# EAGLE board rcontrolv0.1 (EAGLE 6.5.0)
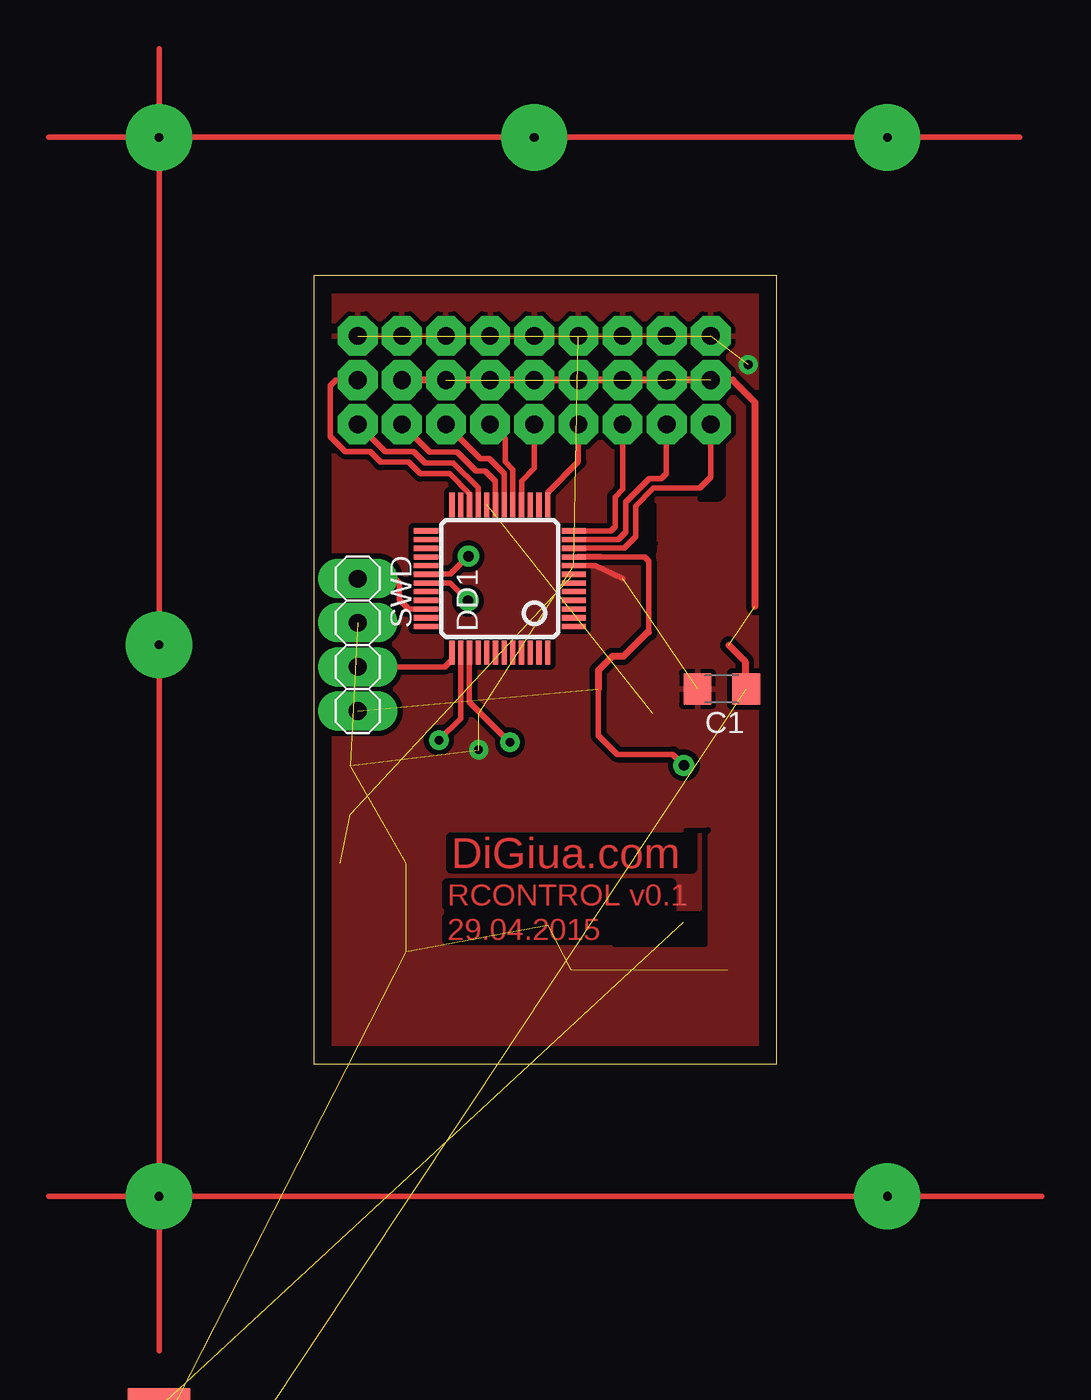
[diagram p0: board, top side]
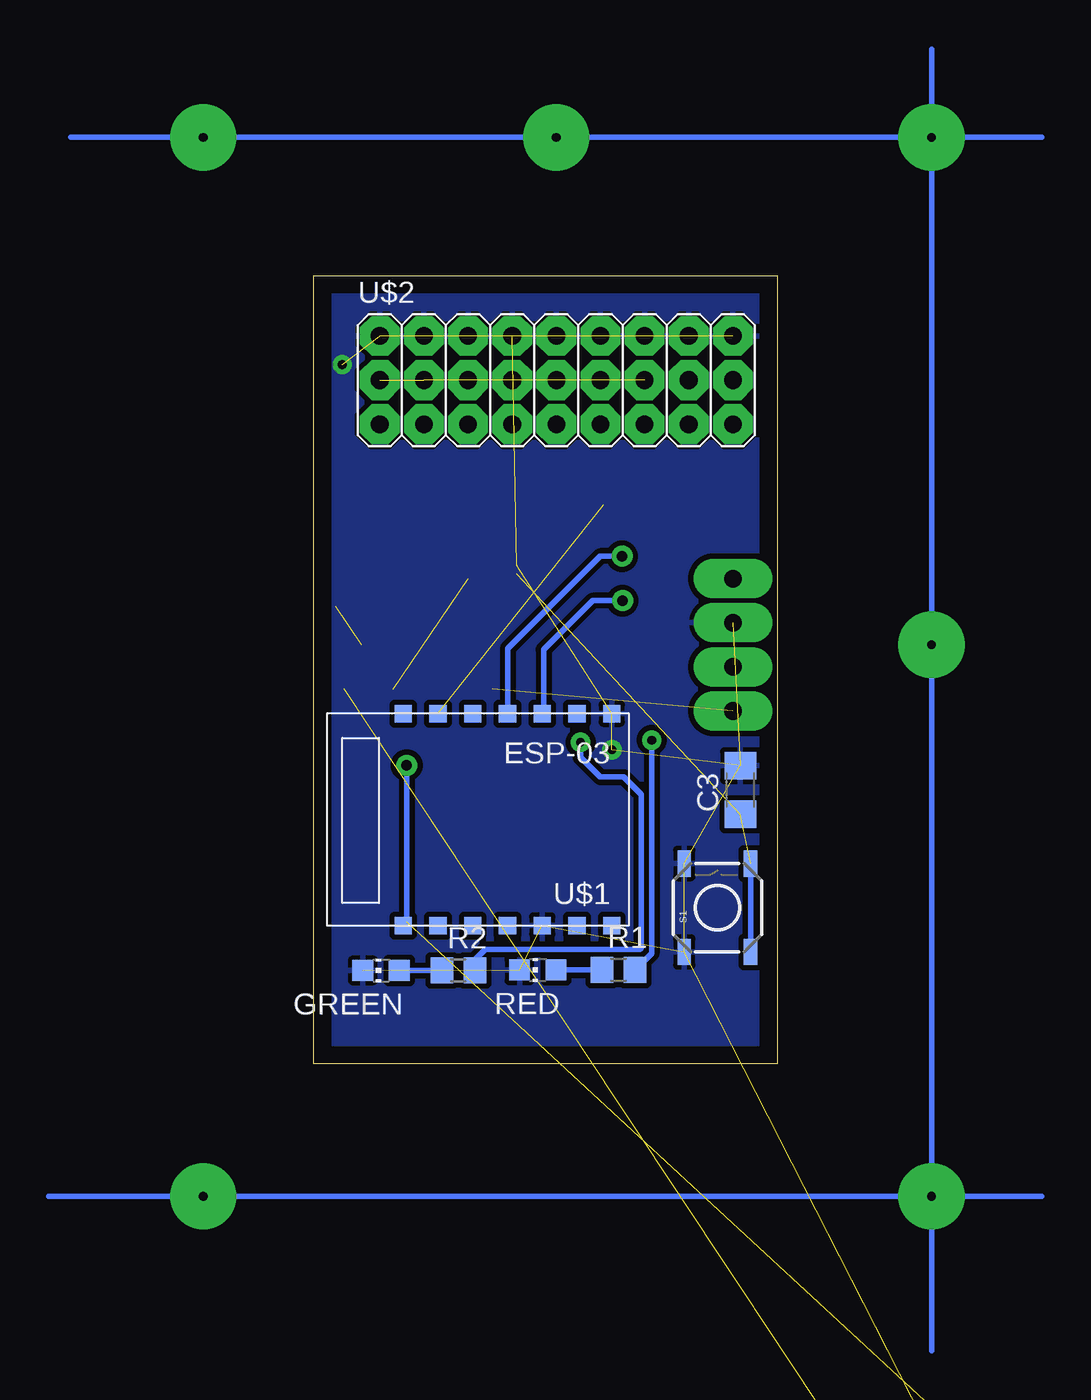
[diagram p1: board, bottom side, seen from below]

Size 26.65 x 45.39 mm. Coordinates in mm from the lower left corner, seen from the top.
Outline: 0,0 26.65,0 26.65,45.39 0,45.39 0,0
Copper layers (1*16): Top 0.035mm / dielectric 1.5mm / Bottom 0.035mm
Design rules "my": minimum track width 10mil, minimum drill 32mil, track to track 12mil, track to pad 12mil, pad to pad 12mil, via to via 12mil, smd to smd 8mil, copper to edge 40mil, drill to drill 8mil, minimum pad ring 25mil, minimum via ring 12mil, stop-mask expansion 4mil, vias tented up to drill 0mil, thermal gap 10mil
tRestrict: 24 lines

## Footprints (pad centres in the part's own frame; a part is rotated, then mirrored left to right if it is on the bottom)
C1206 = smd 1.6 x 1.8: 1 -1.4,0; 2 1.4,0
CT3528 = smd 2 x 2.2: + -1.5,0; - 1.5,0
LQFP48 = smd 0.3 x 1.4: 1 -2.75,-4.25; 2 -2.25,-4.25; 3 -1.75,-4.25; 4 -1.25,-4.25; 5 -0.75,-4.25; 6 -0.25,-4.25; 7 0.25,-4.25; 8 0.75,-4.25; 9 1.25,-4.25; 10 1.75,-4.25; 11 2.25,-4.25; 12 2.75,-4.25; 25 2.75,4.25; 26 2.25,4.25; 27 1.75,4.25; 28 1.25,4.25; 29 0.75,4.25; 30 0.25,4.25; 31 -0.25,4.25; 32 -0.75,4.25; 33 -1.25,4.25; 34 -1.75,4.25; 35 -2.25,4.25; 36 -2.75,4.25 | smd 1.4 x 0.3: 13 4.25,-2.75; 14 4.25,-2.25; 15 4.25,-1.75; 16 4.25,-1.25; 17 4.25,-0.75; 18 4.25,-0.25; 19 4.25,0.25; 20 4.25,0.75; 21 4.25,1.25; 22 4.25,1.75; 23 4.25,2.25; 24 4.25,2.75; 37 -4.25,2.75; 38 -4.25,2.25; 39 -4.25,1.75; 40 -4.25,1.25; 41 -4.25,0.75; 42 -4.25,0.25; 43 -4.25,-0.25; 44 -4.25,-0.75; 45 -4.25,-1.25; 46 -4.25,-1.75; 47 -4.25,-2.25; 48 -4.25,-2.75
CHIP-LED0805 = smd 1.2 x 1.2: A 0,-1.05; C 0,1.05
SOT223 = smd 1.219 x 2.235: 1 -2.311,-3.099; 2 0,-3.099; 3 2.311,-3.099 | smd 3.6 x 2.2: TAB 0,3.099
R0805 = smd 1.3 x 1.5: 1 -0.95,0; 2 0.95,0
TACTILE_SWITCH_SMD = smd 1.524 x 0.762: 1 -2.54,1.905; 2 2.54,1.905; 3 -2.54,-1.905; 4 2.54,-1.905
1X04 = drill 1.016 long: 1 -3.81,0; 2 -1.27,0; 3 1.27,0; 4 3.81,0
ESP-03 = smd 1 x 1: 1 6.2,-7; 2 6.2,-5; 3 6.2,-3; 4 6.2,-1; 5 6.2,1; 6 6.2,3; 7 6.2,5; 8 -6,5; 9 -6,3; 10 -6,1; 11 -6,-1; 12 -6,-3; 13 -6,-5; 14 -6,-7
3X09 = drill 1.016 octagon: 1 1.27,3.81; 2 1.27,6.35; 3 1.27,8.89; 4 3.81,3.81; 5 3.81,6.35; 6 3.81,8.89; 7 6.35,3.81; 8 6.35,6.35; 9 6.35,8.89; 10 8.89,3.81; 11 8.89,6.35; 12 8.89,8.89; 13 11.43,3.81; 14 11.43,6.35; 15 11.43,8.89; 16 13.97,3.81; 17 13.97,6.35; 18 13.97,8.89; 19 16.51,3.81; 020 16.51,6.35; 20 1.27,6.35; 21 1.27,6.35; 021 16.51,8.89; 022 19.05,3.81; 22 1.27,6.35; 023 19.05,6.35; 23 1.27,6.35; 24 19.05,8.89; 25 21.59,3.81; 26 21.59,6.35; 27 21.59,8.89

## Placement (x,y rotation side)
C1  0.1uF  [C1206]  23.5,21.59 180 top
C2  [CT3528]  -11.43,-31.75 0 top  (outside the outline)
C3  0.1uF  [C1206]  2.11,15.77 90 bottom
DD1  [LQFP48]  10.72,27.94 90 top
GREEN  [CHIP-LED0805]  22.78,5.38 90 bottom
IC1  LM1117IMPX-3.3  [SOT223]  -8.89,-22.86 0 top  (outside the outline)
R1  160  [R0805]  9.12,5.41 0 bottom
R2  160  [R0805]  18.34,5.38 0 bottom
RED  [CHIP-LED0805]  13.77,5.41 90 bottom
S1  [TACTILE_SWITCH_SMD]  3.43,8.99 90 bottom
SWD  [1X04]  2.54,24.13 270 top
U$1  ESP8266_ESP-03  [ESP-03]  16.51,13.97 90 bottom
U$2  [3X09]  24.13,33.02 0 bottom

## Library data of the parts
C1-C3 R1 R2 = rcl
DD1 = pepelac
GREEN RED = led
IC1 = lm1117
S1 = SparkFun-Electromechanical; PROD_ID: SWCH-08247
SWD U$2 = pinhead
U$1 = ESP8266

## Nets
+3V3: DD1.9 IC1.TAB SWD.4 U$1.8
GND: C1.2 C2.- C3.2 DD1.8 GREEN.C IC1.1 RED.C S1.1 S1.2 SWD.2 U$1.1 U$1.12 U$2.3 U$2.6 U$2.9 U$2.12 U$2.15 U$2.18 U$2.021 U$2.24 U$2.27
N$1: DD1.30 U$1.4
N$2: DD1.31 U$1.3
N$3: DD1.37 SWD.3
N$4: DD1.21 U$2.25
N$5: DD1.34 SWD.1
N$7: DD1.38 R1.2
N$8: DD1.39 R2.2
N$10: DD1.10 U$2.1
N$11: DD1.11 U$2.4
N$12: DD1.12 U$2.7
N$13: DD1.13 U$2.10
N$14: DD1.16 U$2.13
N$15: DD1.17 U$2.16
N$16: DD1.18 U$2.19
N$17: DD1.19 U$2.022
N$18: DD1.22 U$2.26
N$20: R1.1 RED.A
N$21: GREEN.A R2.1
N$23: C1.1 IC1.3 U$2.2 U$2.5 U$2.8 U$2.11 U$2.14 U$2.17 U$2.020 U$2.023
N$34: DD1.20 U$1.6
N$35: C2.+ IC1.2
N$36: C3.1 DD1.7 S1.3 S1.4

## Tracks (layer width: path | path; a pad name or v marks a point on that pad's centre or on a via)
+3V3  (via drill 0.6 pad 0.3)  (2 unrouted)
  Top 0.305: DD1.9 19.05,29.19 19.28,28.96 19.28,24.84 | 16.38,21.59 16.38,18.92 17.48,17.83 20.68,17.83 v21.31,17.2
  Top 0.406: 19.28,24.84 19.2,24.84 17.83,23.47 17.2,23.47 16.38,22.66 16.38,21.59
  Bottom 0.305: v21.31,17.2 21.31,8.17 U$1.8
GND  (via drill 0.5 pad 0.25)  (23 unrouted)
  Top 0.305: 17.78,27.94 16.2,28.7 14.96,28.7
  other vias: 25.02,40.26 9.5,18.08
  pour Top: 0,45.72 26.67,45.72 26.67,0 0,0
  pour Bottom: 0,45.72 26.67,45.72 26.67,0.25 26.42,0 0,0
N$1  (via drill 0.6 pad 0.3)
  Top 0.305: DD1.30 7.87,28.19 v8.91,29.23
  Bottom 0.305: v8.91,29.23 10.19,29.23 15.49,23.93 15.49,20.19 U$1.4
N$2  (via drill 0.6 pad 0.3)
  Top 0.305: DD1.31 7.87,27.69 v8.89,26.67
  Bottom 0.305: v8.89,26.67 10.62,26.67 13.44,23.85 13.44,20.24 U$1.3
N$3
  Top 0.305: DD1.37 7.97,23.29 7.54,22.86 SWD.3
N$4
  Top 0.305: DD1.21 9.47,33.18 8.05,34.59 6.43,34.59 5.77,35.26 4.12,35.26 U$2.25
N$5
  Top 0.305: DD1.34 5.48,26.19 4.93,26.75 4.93,27.69 4.67,27.94 SWD.1
N$7  (via drill 0.5 pad 0.25)
  Top 0.305: DD1.38 8.47,19.9 v7.21,18.64
  Bottom 0.305: v7.21,18.64 7.21,6.37 R1.2
N$8  (via drill 0.5 pad 0.25)
  Top 0.305: DD1.39 8.97,20.85 v11.3,18.52
  Bottom 0.305: v11.3,18.52 11.3,17.65 10.16,16.51 8.81,16.51 7.82,15.52 7.82,6.68 7.9,6.6 16.79,6.6 17.35,6.04 17.35,5.42 R2.2
N$9  (via drill 0.5 pad 3.81)
  other vias: -8.89,53.34
N$10
  Top 0.305: DD1.10 17.88,29.69 18.54,30.35 18.54,32.13 19.56,33.15 22.23,33.15 22.86,33.78 U$2.1
N$11
  Top 0.305: DD1.11 17.54,30.19 17.96,30.61 17.96,32.33 19.33,33.71 20.02,33.71 20.3,33.98 20.3,36.8 U$2.4
N$12
  Top 0.305: DD1.12 17.1,30.69 17.35,30.94 17.35,32.64 17.8,33.1 17.8,36.8 U$2.7
N$13
  Top 0.305: DD1.13 13.47,32.9 15.24,34.67 U$2.10
N$14
  Top 0.305: DD1.16 11.97,33.56 12.7,34.29 U$2.13
N$15
  Top 0.305: DD1.17 11.47,34.23 11.02,34.67 11.02,35.97 U$2.16
N$16
  Top 0.305: DD1.18 10.97,33.99 10.11,34.85 9.6,34.85 U$2.19
N$17
  Top 0.305: DD1.19 10.47,33.55 9.88,34.14 9.37,34.14 8.28,35.23 6.68,35.23 U$2.022
N$18
  Top 0.305: DD1.22 8.97,32.84 7.82,33.98 6.15,33.98 5.49,34.65 3.86,34.65 3.25,35.26 1.83,35.26 0.96,36.12 0.96,39.06 1.27,39.37 U$2.26
N$19
  Top 0.305: 15.24,29.21 16.51,29.21
N$20
  Bottom 0.305: RED.A R1.1
N$21
  Bottom 0.305: GREEN.A R2.1
N$22  (via drill 0.5 pad 3.81)
  other vias: 33.02,53.34
N$23  (8 unrouted)
  Top 0.406: U$2.023 U$2.2 24.13,39.37 25.4,38.1 25.4,26.34 | 23.9,24.11 24.84,23.16 24.84,21.64 C1.1
N$24  (via drill 0.5 pad 3.81)
  other vias: 33.02,-7.62
N$25  (via drill 0.5 pad 3.81)
  other vias: -8.89,-7.62
N$26  (via drill 0.5 pad 3.81)
  other vias: -8.89,24.13
N$27  (via drill 0.5 pad 3.81)
  other vias: 12.7,53.34
N$28
  Top 0.305: -8.89,58.45 -8.89,-16.51
N$29
  Bottom 0.305: -8.89,-16.51 -8.89,58.42
N$30
  Bottom 0.305: -15.24,53.34 40.64,53.34
N$31
  Top 0.305: 40.64,53.34 -15.24,53.34
N$32
  Top 0.305: -15.24,-7.62 41.91,-7.62
N$33
  Bottom 0.305: 41.91,-7.62 -15.24,-7.62
N$34  (1 unrouted)
N$35  (1 unrouted)
N$36  (2 unrouted)
  Bottom 0.305: S1.3 S1.4

## Text on the board
Top: DiGiua.com | RCONTROL v0.1 | 29.04.2015